# Altium PCB 16-TemHumdIr.PcbDoc
Units mm, origin at the board's own origin, x right, y up, seen from the top; angles counter-clockwise.
Board outline 40 x 40 mm, 4 copper layers (Top Layer, Internal Plane 1, Internal Plane 2, Bottom Layer), stack 0.462 mm thick; 18 components, 9 nets, 54 pads, 16 vias.
Unrouted connection lines stored in the file: 35.
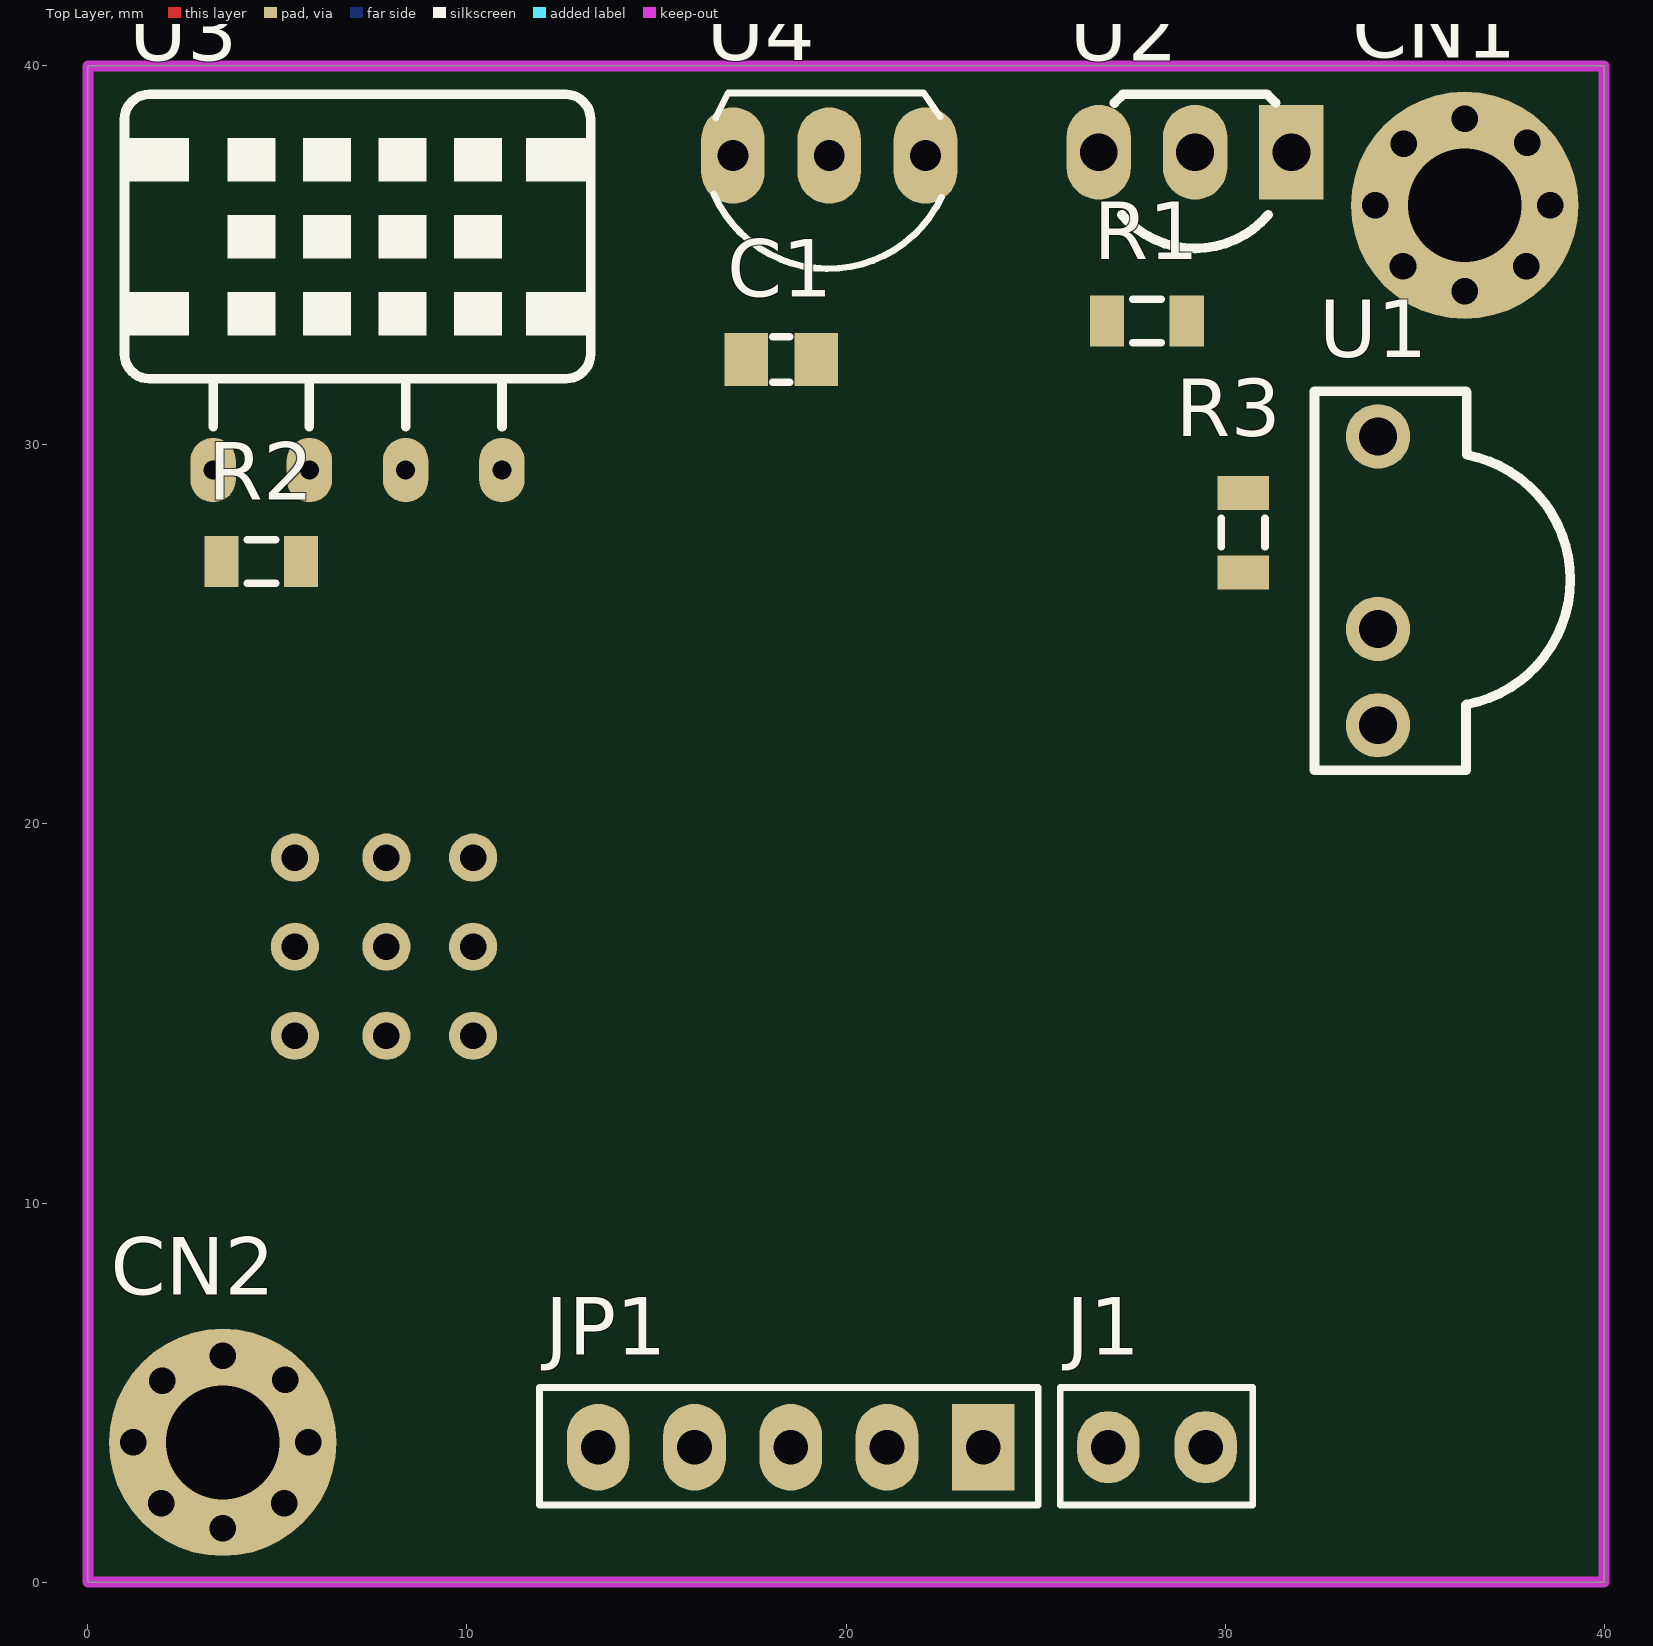
[diagram p0: Top Layer view]
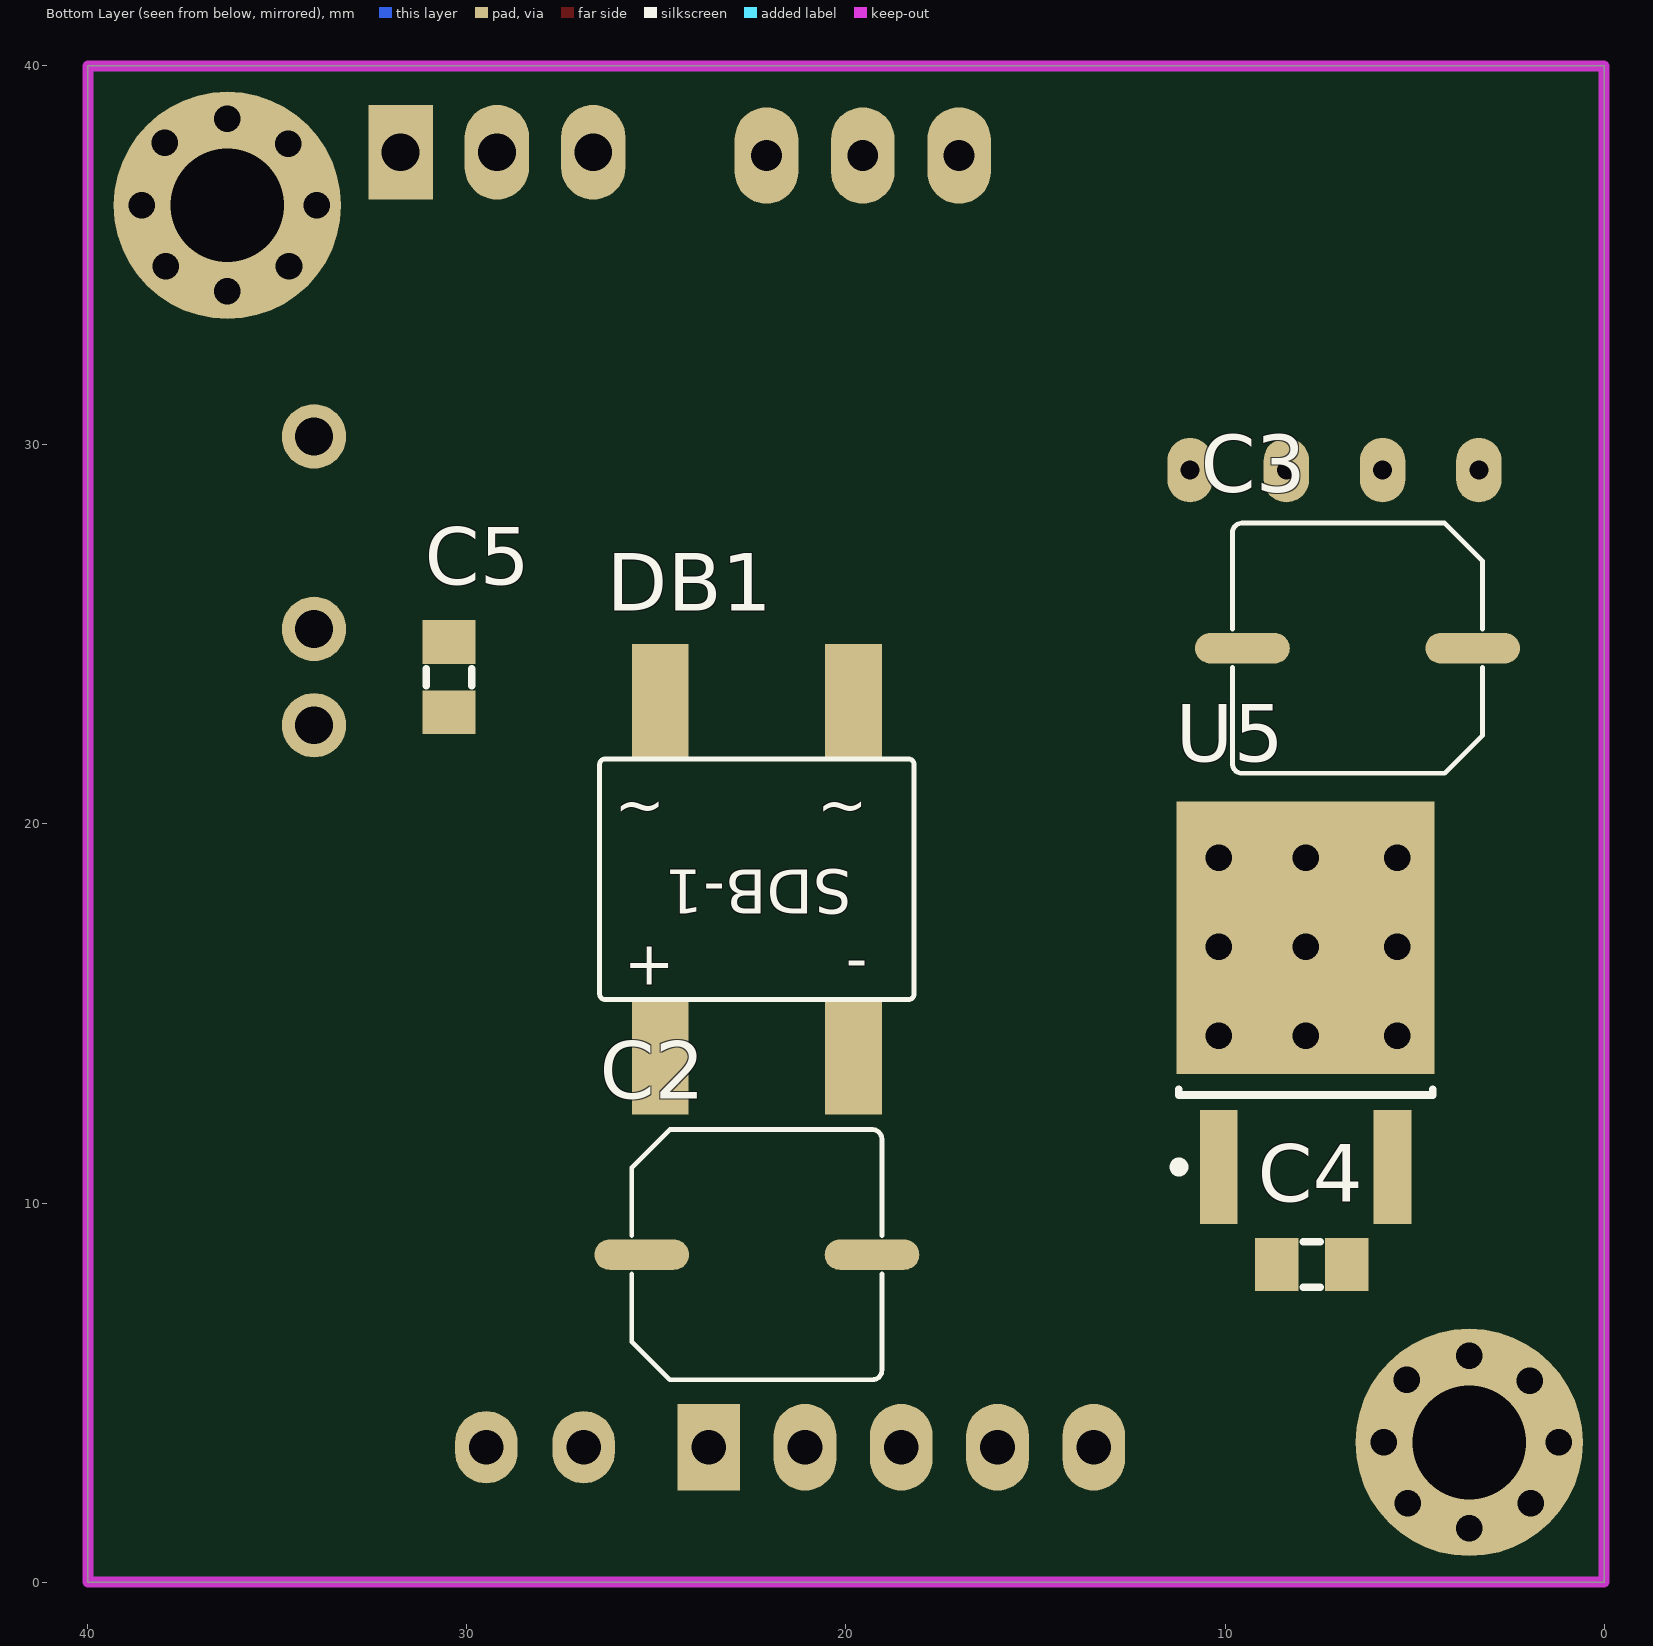
[diagram p1: Bottom Layer view, seen from below]
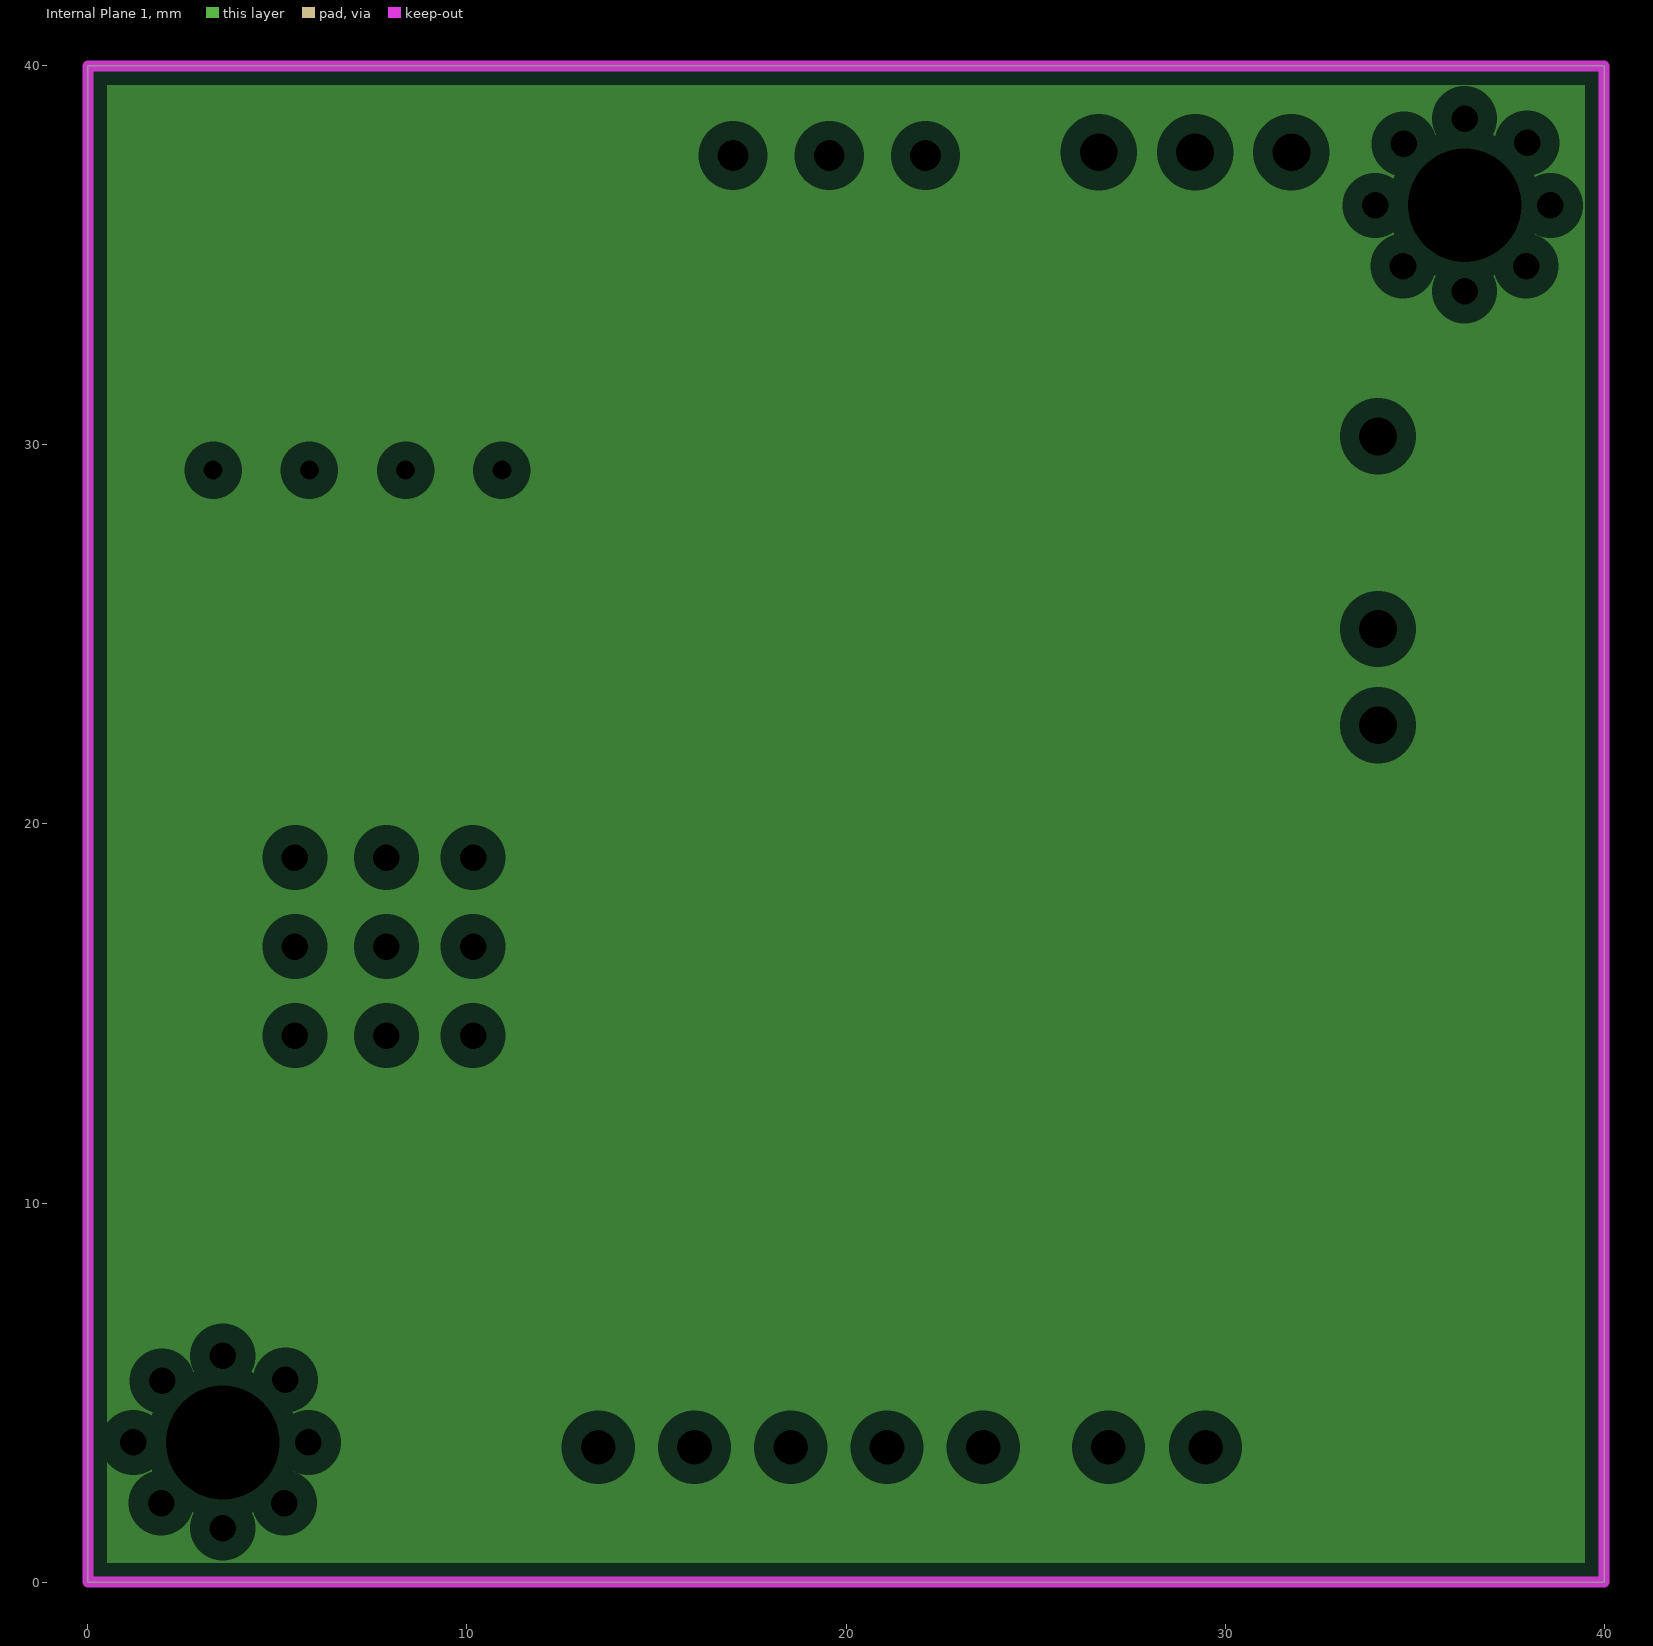
[diagram p2: Internal Plane 1, clearances drawn from the general rule]
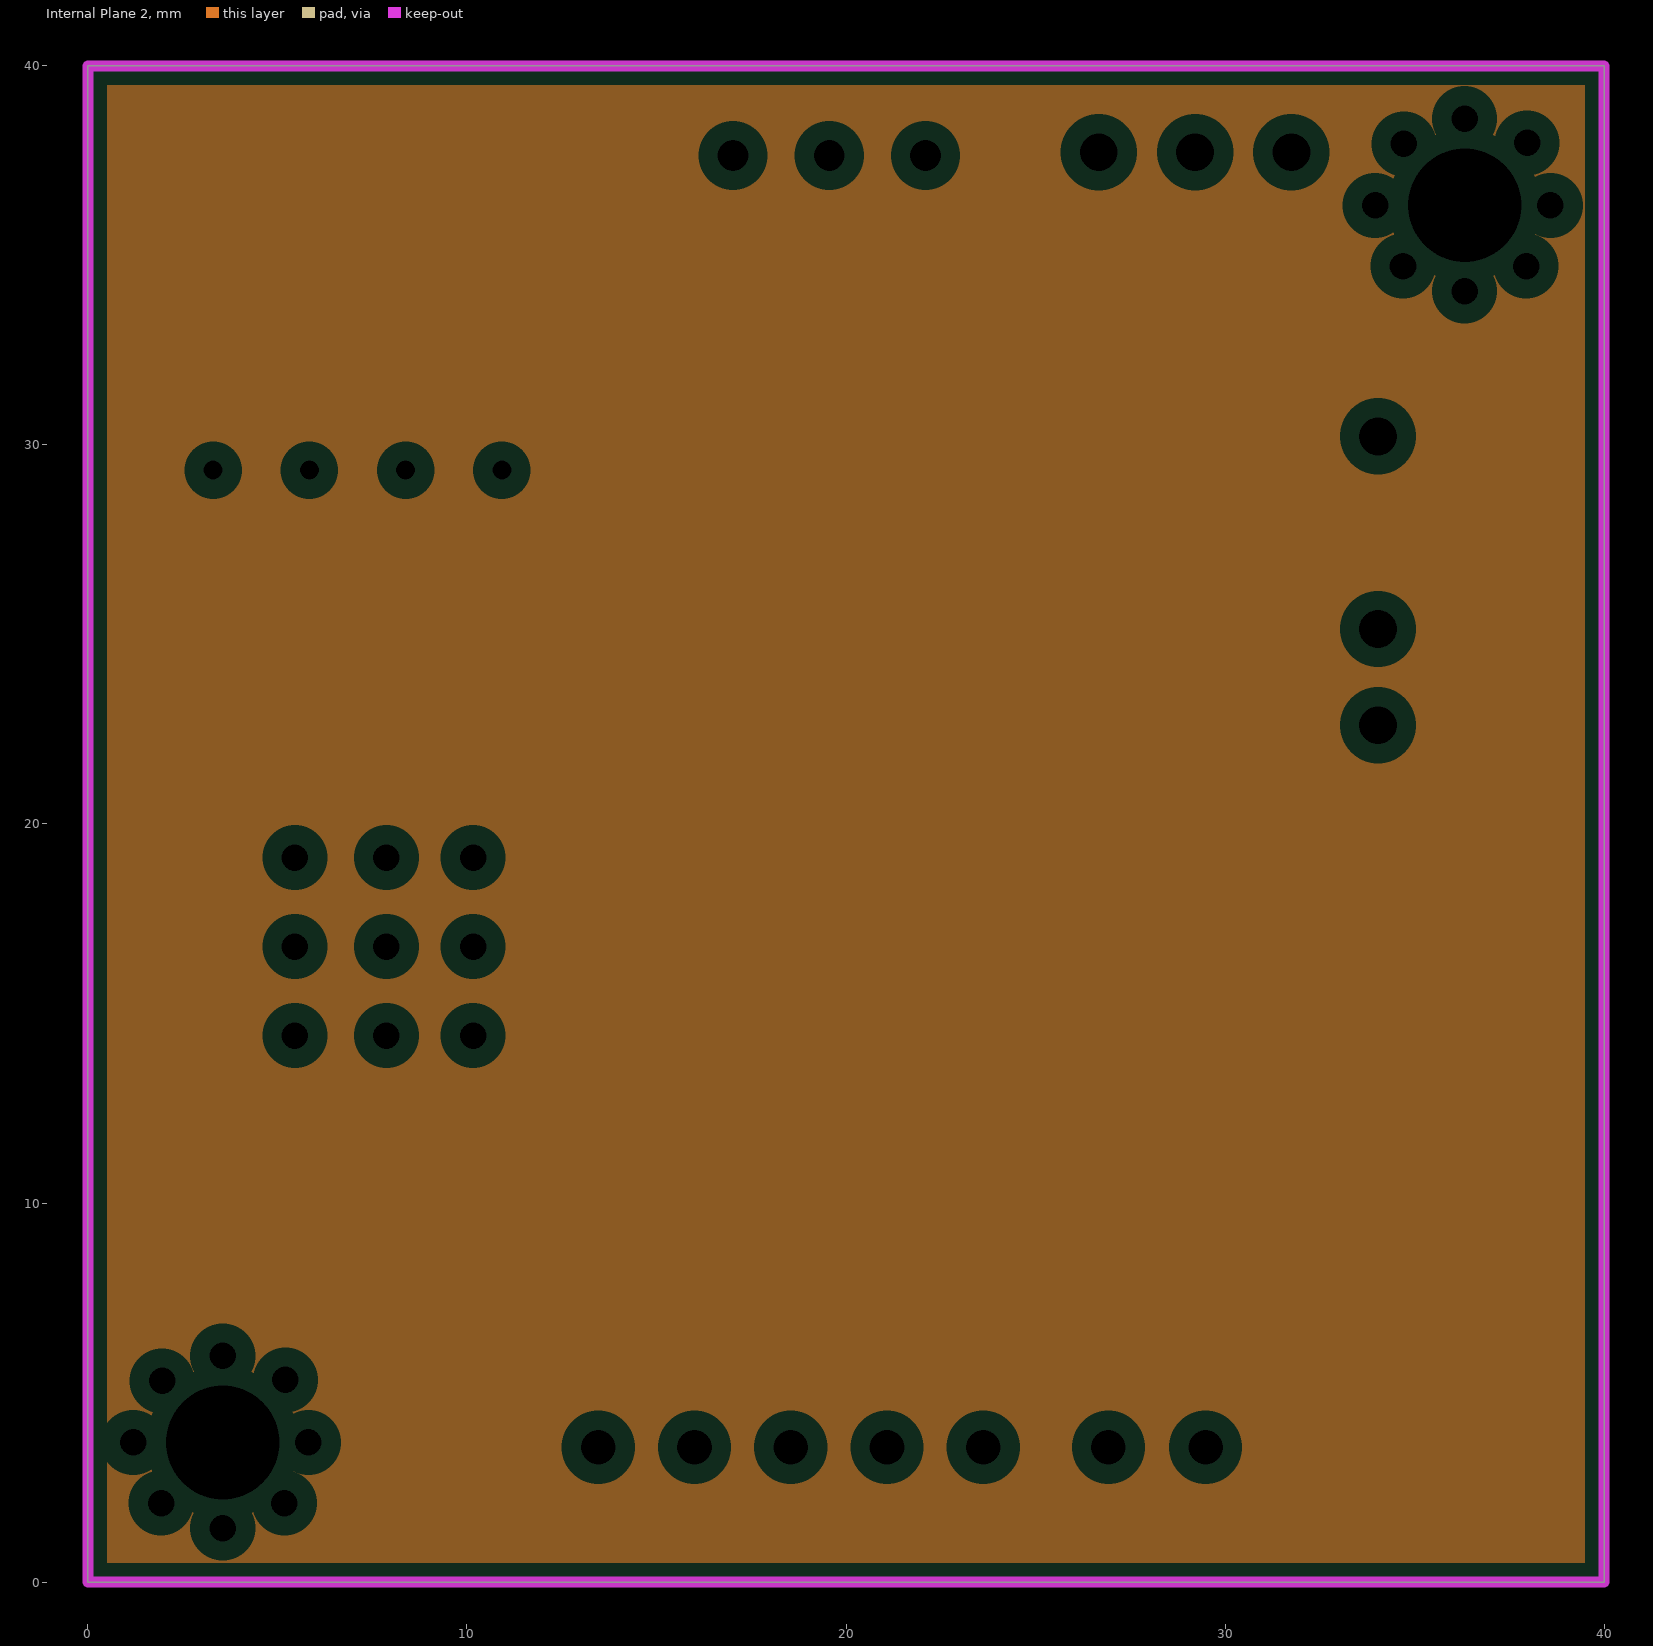
[diagram p3: Internal Plane 2, clearances drawn from the general rule]

## Layer stack, top to bottom
Top Solder: solder mask 0.0102, Solder Resist, Dk 3.5
Top Layer: signal copper 0.0356
Internal Plane 1: plane copper 0.0356
Internal Plane 2: plane copper 0.0356
Dielectric 1: dielectric 0.32, FR-4, Dk 4.8
Bottom Layer: signal copper 0.0356
Bottom Solder: solder mask 0.0102, Solder Resist, Dk 3.5

## Board outline
0,0 40,0 40,40 0,40

## Design rules (kind name [scope] priority, off if disabled: settings)
Clearance [All] p1: gap=0.2
PlaneClearance [All] p1: clearance=0.508
PlaneConnect [All] p1: planeconnectstyle=Relief reliefexpansion=0.508 reliefentries=4 reliefconductorwidth=0.254 reliefairgap=0.254
PolygonConnect [All] p1: connectstyle=Relief reliefconductorwidth=0.254 reliefentries=4 polygonreliefangle="90 Angle" airgapwidth=0.254
RoutingVias [All] p1: holewidth=0.6 width=1 viastyle="Through Hole" minholewidth=0.711 minwidth=1.27 maxholewidth=0.711 maxwidth=1.27
SolderMaskExpansion [All] p1: expansion=0.102
Width [All] p1: maxlimit=0.2 minlimit=0.2 preferedwidth=0.2
28 further rules are at their usual default settings.

## Components (designator, comment, footprint, x,y, rotation, side; value= is the part's Value field where it differs from the comment)
C1 "104" C-0805 18.288,32.258 r0 top
C2 "470uF" C-ALU-D6.5 22.352,8.636 r90 bottom
C3 "470uF" C-ALU-D6.5 6.502,24.638 r270 bottom
C4 "104" C-0805 7.711,8.382 r180 bottom
C5 "104" C-0805 30.48,23.876 r90 bottom
CN1 "VIN1" M3 36.322,36.322 r0 top
CN2 "VIN2" M3 3.556,3.683 r0 top
DB1 "Diode Brideg" D-DB-1A-SMD 22.352,18.542 r0 bottom
J1 "Jumper 2" JP2 26.924,3.556 r0 top
JP1 "JP5" JP5 23.622,3.556 r180 top
R1 "10K" R-0805 27.94,33.274 r180 top
R2 "10K" R-0805 4.572,26.924 r180 top
R3 "10K" R-0805 30.48,27.686 r270 top
U1 "IR1" IR-TSOP1133 35.56,26.416 r90 top
U2 "DS18S20" TO-92AB 29.21,37.725 r180 top
U3 "DHT112" DHT12 7.112,31.75 r0 top
U4 "LM35" QTO-92 19.558,37.637 r180 top
U5 "ASM1117" TO-252 7.874,15.05 r90 bottom

## Footprints (in the part's own frame and the unit in brackets; to place one, negate y for a bottom-side part, rotate by r counter-clockwise, add the part's x,y. Pads: shape width x height; smd on the part's side, far side on the other; paste and mask are expansions set on the pad)
C-0805 [mm] "Chip Capacitor, 2-Leads, Body 2.0x1.3mm, IPC Medium Density"
  rect 1.15x1.4 smd: 1(-0.925,0) 2(0.925,0)
  silkscreen extent -0.23,-0.6 0.23,0.6, body extent -1,-0.63 1,0.63, height 0.5
C-ALU-D6.5 [mm] "6.3x5.4mm"
  oval 0.8x2.5 smd: 1(0,3.038) 2(0,-3.038)
  silkscreen extent -3.3,-3.3 3.3,3.3, body extent -3.3,-3.8 3.3,3.8, height 6.25
D-DB-1A-SMD [mm] "DB106S"
  rect 1.5x3 smd: 1(-2.55,-4.713) 2(2.55,-4.713) 3(2.55,4.713) 4(-2.55,4.713)
  silkscreen extent -4.15,-3.18 4.15,3.18, body extent -4.15,-4.95 4.15,4.95, height 3.35
DHT12 [mm]
  oval 1.2x1.7 hole 0.5: 1(-3.81,-2.413) 2(-1.27,-2.413) 3(1.27,-2.413) 4(3.81,-2.413)
  silkscreen extent -6.15,-1.27 6.15,7.5
IR-TSOP1133 [mm] "Cam bien hong ngoai loai to"
  round 1.7 hole 1: 1(-3.81,1.524) 2(-1.27,1.524) 3(3.81,1.524)
  silkscreen extent -5,-3.55 5,3.2, body extent -5.04,-3.55 4.96,3.2, height 15.75
JP2 [mil]
  oval 65x75 hole 36: 1(0,0) 2(101,0)
  silkscreen extent -50,-60 150,62, body extent -48,-50 148,48, height 323
JP5 [mil] "JP5"
  rect 65x90 hole 36: 1(0,0)
  oval 65x90 hole 36: 2(100,0) 3(200,0) 4(300,0) 5(400,0)
  silkscreen extent -57,-62 461,60, body extent -48,-53 448,45, height 323
M3 [mm]
  round 6 hole 3: 1(0,0)
QTO-92 [mil] "TO-92"
  oval 66x100 hole 32: 1(-100,0) 2(0,0) 3(100,0)
  silkscreen extent -117,-65 120,118, body extent -109,-66 109,96, height 364
R-0805 [mm] "Chip Resistor, 2-Leads, Body 2.0x1.3mm, IPC Medium Density"
  rect 0.9x1.35 smd: 1(-1.05,0) 2(1.05,0)
  silkscreen extent -0.38,-0.58 0.38,0.58, body extent -1,-0.63 1,0.63, height 0.5
TO-92AB [mm] "Length 200mil - Width 150mil"
  rect 1.7x2.5 hole 1: 1(-2.54,0)
  oval 1.7x2.5 hole 1: 2(0,0) 3(2.54,0)
  silkscreen extent -2.12,-1.53 2.12,2.54, body extent -2.79,-1.59 2.79,2.61, height 10
TO-252 [mm] "AMS1117"
  rect 3x1 smd: 1(-4.1,2.29) 3(-4.1,-2.29)
  round 1.27 hole 0.7: 2(-0.635,-2.413) 2(-0.635,0) 2(-0.635,2.286) 2(1.714,-2.413) 2(1.714,0) 2(1.714,2.286) 2(4.064,-2.413) 2(4.064,0) 2(4.064,2.286)
  rect 7.2x6.8 smd: 2(1.95,0)
  silkscreen extent -4.22,-3.35 -2.05,3.47, body extent -4.55,-3.37 5.36,3.37, height 2.39

## Part data
C1 C4 C5: library part CN
C2 C3: library part CP1, "Cap P  0,1uF < 22uF , 16 - 50V"
CN1 CN2: library part COCDONGM3
DB1: library part DB, "Convert AC to DC voltage, 4 pin"
J1: library part "JP 2"
R1 R2 R3: library part R, "Resistor 1/4W"
U1: "Receiver Infraed IC"
U2: "High Precision  1-Wire® Digital Thermometer"
U3: library part DHT11
U4: "Teminal"

## Via types
v1: diameter 1, hole 0.7, Top Layer to Bottom Layer, 16 vias

## Nets (pads, with @x,y where several pads share a name; then routed paths per layer and width w, separated by ;. In a path a pad name is that pad's centre, name@x,y a point inside that pad or via, vN(x,y) a via of type N, cw(c..) or ccw(c..) an arc to the next point about the centre after c; other vN are vias at no path point)
+5V: C3.1 C5.2 J1.2 R1.2 R2.2 R3.2 U1.2 U2.3 U3.1 U4.1 U5.2
+12V: C2.1 C4.2 DB1.3 U5.3
DHT12: JP1.3 R2.1 U3.2
DS18B20: JP1.4 R1.1 U2.2
GND: C1.1 C2.2 C3.2 C4.1 C5.1 DB1.4 J1.1 JP1.1 U1.1 U2.1 U3.4 U4.3 U5.1
IR: JP1.2 R3.1 U1.3
LM35: C1.2 JP1.5 U4.2
NetCN1_1: CN1.1 DB1.2
  other v1: 36.322,34.061 34.696,34.722 37.948,34.722 33.96,36.322 38.583,36.322 34.722,37.948 37.973,37.973 36.322,38.608
NetCN2_1: CN2.1 DB1.1
  other v1: 3.556,1.422 1.93,2.083 5.182,2.083 1.194,3.683 5.817,3.683 1.956,5.309 5.207,5.334 3.556,5.969
pads on no net: U3.3

## Keep-outs
Keep-Out Layer:
  the board outline again, w0.3

## Text inside footprints (layer, text, board x,y; h text height)
DB1: Bottom Overlay "~        ~" at 19.431,21.336 h2 r180; Bottom Overlay "-         +" at 19.431,17.145 h2 r180; Bottom Overlay "SDB-1" at 19.844,19.182 h2 r180